# Allegro board route1.brd
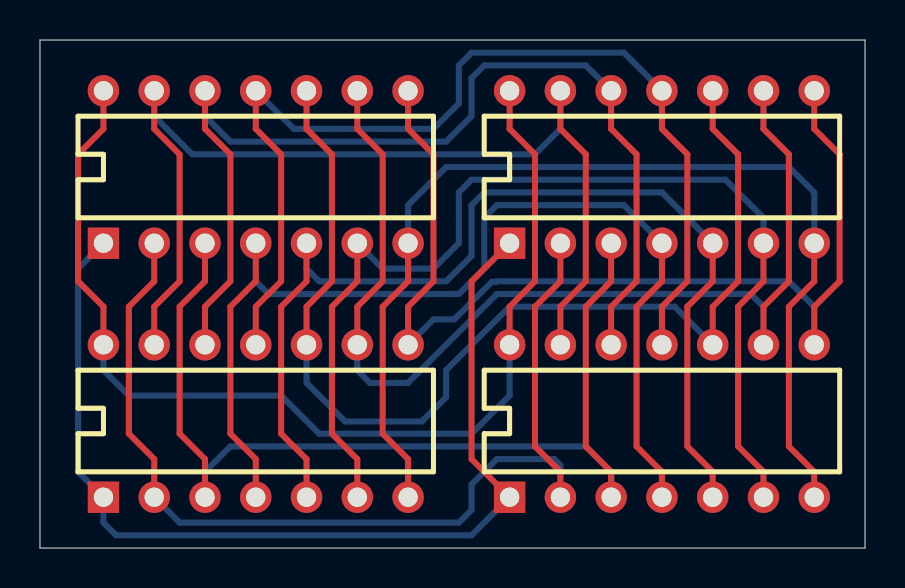
[diagram p0: board, top side]
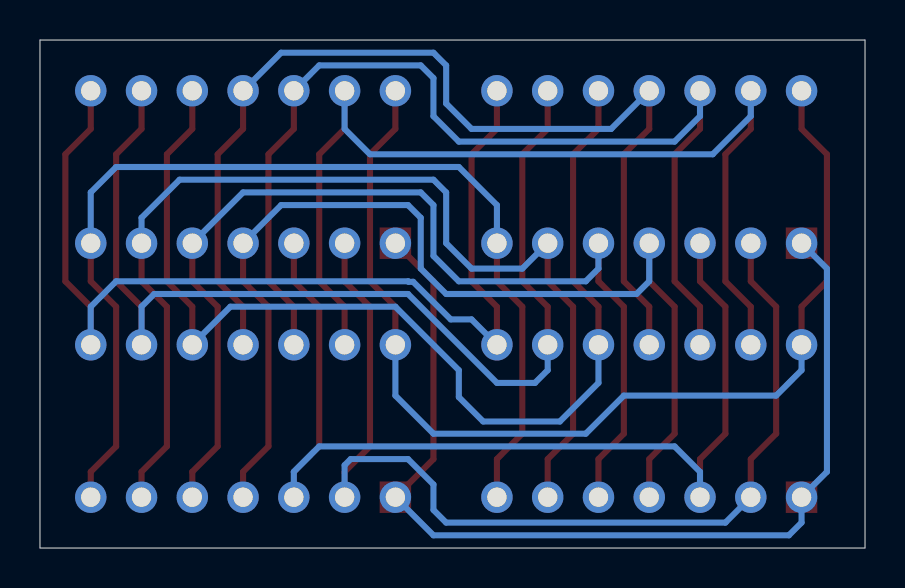
[diagram p1: board, bottom side, seen from below]

Outline 41.27 x 25.4 mm; copper layers: TOP, GND, POWER, INNER1, INNER2, BOTTOM. Coordinates in mm from the lower left corner of the outline.
Outline path: 0,25.4 0,0 41.27,0 41.27,25.4 0,25.4

## Design rules (mm)
nets with their own width: min track width 0.305; nets DAT1 DAT2 DAT3 DAT4 DAT5 DAT6 DAT7 DAT8 DAT9 DAT10 DAT11 DAT12 GND VCC

## Placement (name value [footprint] x y rotation side)
U1  7400  [DIP14]  3.18 15.24 0 top
U2  7400  [DIP14]  23.5 15.24 0 top
U3  7400  [DIP14]  3.18 2.54 0 top
U4  7400  [DIP14]  23.5 2.54 0 top

## Library data of the parts
U1-U4 = 7400

## Footprints (pads in the part's own frame, mm; a bottom-side part is the same pattern mirrored in y, then rotated)
DIP14
  rect 1.575x1.575 hole 0.965: 1(0,0)
  round 1.575 hole 0.965: 2(2.54,0) 3(5.08,0) 4(7.62,0) 5(10.16,0) 6(12.7,0) 7(15.24,0) 8(15.24,7.62) 9(12.7,7.62) 10(10.16,7.62) 11(7.62,7.62) 12(5.08,7.62) 13(2.54,7.62) 14(0,7.62)

## Nets
GND: U1.7(TP-7) U2.7(TP-7) U3.7(TP-7) U4.7(TP-7)
VCC: U1.14(TP-14) U2.14(TP-14) U3.14(TP-14) U4.14(TP-14)
DAT1: U1.2(TP-2) U2.2(TP-2) U3.2(TP-2) U4.2(TP-2)
DAT2: U1.1(TP-1) U2.1(TP-1) U3.1(TP-1) U4.1(TP-1)
DAT3: U1.3(TP-3) U2.3(TP-3) U3.3(TP-3) U4.3(TP-3)
DAT4: U1.5(TP-5) U2.5(TP-5) U3.5(TP-5) U4.5(TP-5)
DAT5: U1.4(TP-4) U2.4(TP-4) U3.4(TP-4) U4.4(TP-4)
DAT6: U1.6(TP-6) U2.6(TP-6) U3.6(TP-6) U4.6(TP-6)
DAT7: U1.10(TP-10) U2.10(TP-10) U3.10(TP-10) U4.10(TP-10)
DAT8: U1.9(TP-9) U2.9(TP-9) U3.9(TP-9) U4.9(TP-9)
DAT9: U1.8(TP-8) U2.8(TP-8) U3.8(TP-8) U4.8(TP-8)
DAT10: U1.13(TP-13) U2.13(TP-13) U3.13(TP-13) U4.13(TP-13)
DAT11: U1.12(TP-12) U2.12(TP-12) U3.12(TP-12) U4.12(TP-12)
DAT12: U1.11(TP-11) U2.11(TP-11) U3.11(TP-11) U4.11(TP-11)

## Routing (per net, layer and track width the routed paths; a pad name or vN(x,y) marks a point on that pad's centre or on a via; arc(x,y) is an arc through that point)
GND: length 53.6
  TOP w0.305: U1.7 18.41,13.34 17.14,12.06 17.14,5.71 18.41,4.45 U3.7 ; U2.7 38.73,13.34 37.47,12.06 37.47,5.08 38.73,3.81 U4.7
  BOTTOM w0.305: U1.7 18.41,17.14 20.32,19.05 37.47,19.05 38.73,17.78 U2.7
VCC: length 53.7
  TOP w0.305: U3.14 3.18,12.06 1.91,13.34 1.91,19.69 3.18,20.95 U1.14 ; U2.14 23.5,20.95 24.77,19.69 24.77,13.34 23.5,12.06 U4.14
  BOTTOM w0.305: U4.14 23.5,7.62 21.59,5.71 13.97,5.71 12.06,7.62 4.45,7.62 3.18,8.89 U3.14
DAT1: length 52.1
  TOP w0.305: U2.2 26.04,13.34 24.77,12.06 24.77,5.08 26.04,3.81 U4.2 ; U1.2 5.71,13.34 4.45,12.06 4.45,5.71 5.71,4.45 U3.2
  BOTTOM w0.305: U3.2 6.98,1.27 20.95,1.27 21.59,1.9 21.59,3.17 22.86,4.45 25.73,4.45 26.04,4.14 U4.2
DAT2: length 50.7
  TOP w0.305: U4.1 21.59,4.45 21.59,13.34 U2.1
  BOTTOM w0.305: U1.1 1.91,13.97 1.91,3.81 U3.1 3.18,1.27 3.81,0.63 21.59,0.63 U4.1
DAT3: length 51.4
  TOP w0.305: U4.3 28.57,3.81 27.3,5.08 27.3,12.06 28.57,13.34 U2.3 ; U3.3 8.25,4.45 6.98,5.71 6.98,12.06 8.25,13.34 U1.3
  BOTTOM w0.305: U4.3 28.57,3.81 27.3,5.08 9.52,5.08 8.25,3.81 U3.3
DAT4: length 53.7
  TOP w0.305: U2.5 33.66,13.34 32.38,12.06 32.38,5.08 33.66,3.81 U4.5 ; U1.5 13.33,13.34 12.06,12.06 12.06,5.71 13.33,4.45 U3.5
  BOTTOM w0.305: U1.5 13.33,13.97 13.97,13.34 20.32,13.34 21.59,14.61 21.59,17.14 22.22,17.78 31.12,17.78 U2.5
DAT5: length 54.1
  TOP w0.305: U3.4 10.79,4.45 9.52,5.71 9.52,12.06 10.79,13.34 U1.4 ; U2.4 31.12,13.34 29.84,12.06 29.84,5.08 31.12,3.81 U4.4
  BOTTOM w0.305: U1.4 10.79,13.34 11.43,12.7 20.95,12.7 22.22,13.97 22.22,16.51 22.86,17.14 29.21,17.14 U2.4
DAT6: length 53.7
  TOP w0.305: 36.2,2.54 36.2,3.81 34.92,5.08 34.92,12.06 36.2,13.34 36.2,15.24 ; U3.6 15.88,4.45 14.6,5.71 14.6,12.06 15.88,13.34 U1.6
  BOTTOM w0.305: 36.2,15.24 36.2,16.51 34.29,18.41 21.59,18.41 20.95,17.78 20.95,15.24 19.68,13.97 17.14,13.97 U1.6
DAT7: length 54.5
  TOP w0.305: U1.10 13.33,20.95 14.6,19.69 14.6,13.34 13.33,12.06 U3.10 ; U2.10 33.66,20.95 34.92,19.69 34.92,13.34 33.66,12.06 U4.10
  BOTTOM w0.305: U3.10 13.33,8.26 15.27,6.32 19.1,6.32 20.32,7.54 20.32,8.89 23.5,12.06 31.75,12.06 U4.10
DAT8: length 53.4
  TOP w0.305: U3.9 15.88,12.06 17.14,13.34 17.14,19.69 15.88,20.95 U1.9 ; 36.2,10.16 36.2,12.06 37.47,13.34 37.47,19.69 36.2,20.95 36.2,22.86
  BOTTOM w0.305: 36.2,10.16 36.2,12.06 35.56,12.7 22.86,12.7 18.41,8.26 16.51,8.26 15.88,8.89 U3.9
DAT9: length 51.6
  TOP w0.305: U4.8 38.73,12.06 40,13.34 40,19.69 38.73,20.95 U2.8 ; U3.8 18.41,12.06 19.68,13.34 19.68,19.69 18.41,20.95 U1.8
  BOTTOM w0.305: U4.8 38.73,12.06 37.47,13.34 22.86,13.34 22.83,13.31 22.61,13.31 20.73,11.43 19.68,11.43 U3.8
DAT10: length 52.3
  TOP w0.305: U4.13 26.04,12.06 27.3,13.34 27.3,19.69 26.04,20.95 U2.13 ; U1.13 5.71,20.95 6.98,19.69 6.98,13.34 5.71,12.06 U3.13
  BOTTOM w0.305: U2.13 26.04,20.95 24.77,19.69 7.62,19.69 5.71,21.59 U1.13
DAT11: length 52.8
  TOP w0.305: U4.12 28.57,12.06 29.84,13.34 29.84,19.69 28.57,20.95 U2.12 ; U3.12 8.25,12.06 9.52,13.34 9.52,19.69 8.25,20.95 U1.12
  BOTTOM w0.305: U2.12 27.3,24.13 22.22,24.13 21.59,23.5 21.59,21.59 20.32,20.32 9.52,20.32 8.25,21.59 U1.12
DAT12: length 52.1
  TOP w0.305: U2.11 31.12,20.95 32.38,19.69 32.38,13.34 31.12,12.06 U4.11 ; U1.11 10.79,20.95 12.06,19.69 12.06,13.34 10.79,12.06 U3.11
  BOTTOM w0.305: U1.11 12.7,20.95 19.68,20.95 20.95,22.23 20.95,24.13 21.59,24.77 29.21,24.77 U2.11
